# Altium PCB Mach_In.PcbDoc
Units mm, origin at the board's own origin, x right, y up, seen from the top; angles counter-clockwise.
Board outline 160 x 75 mm, 2 copper layers (Top Layer, Bottom Layer); 14 components, 15 nets, 102 pads, 2 vias.
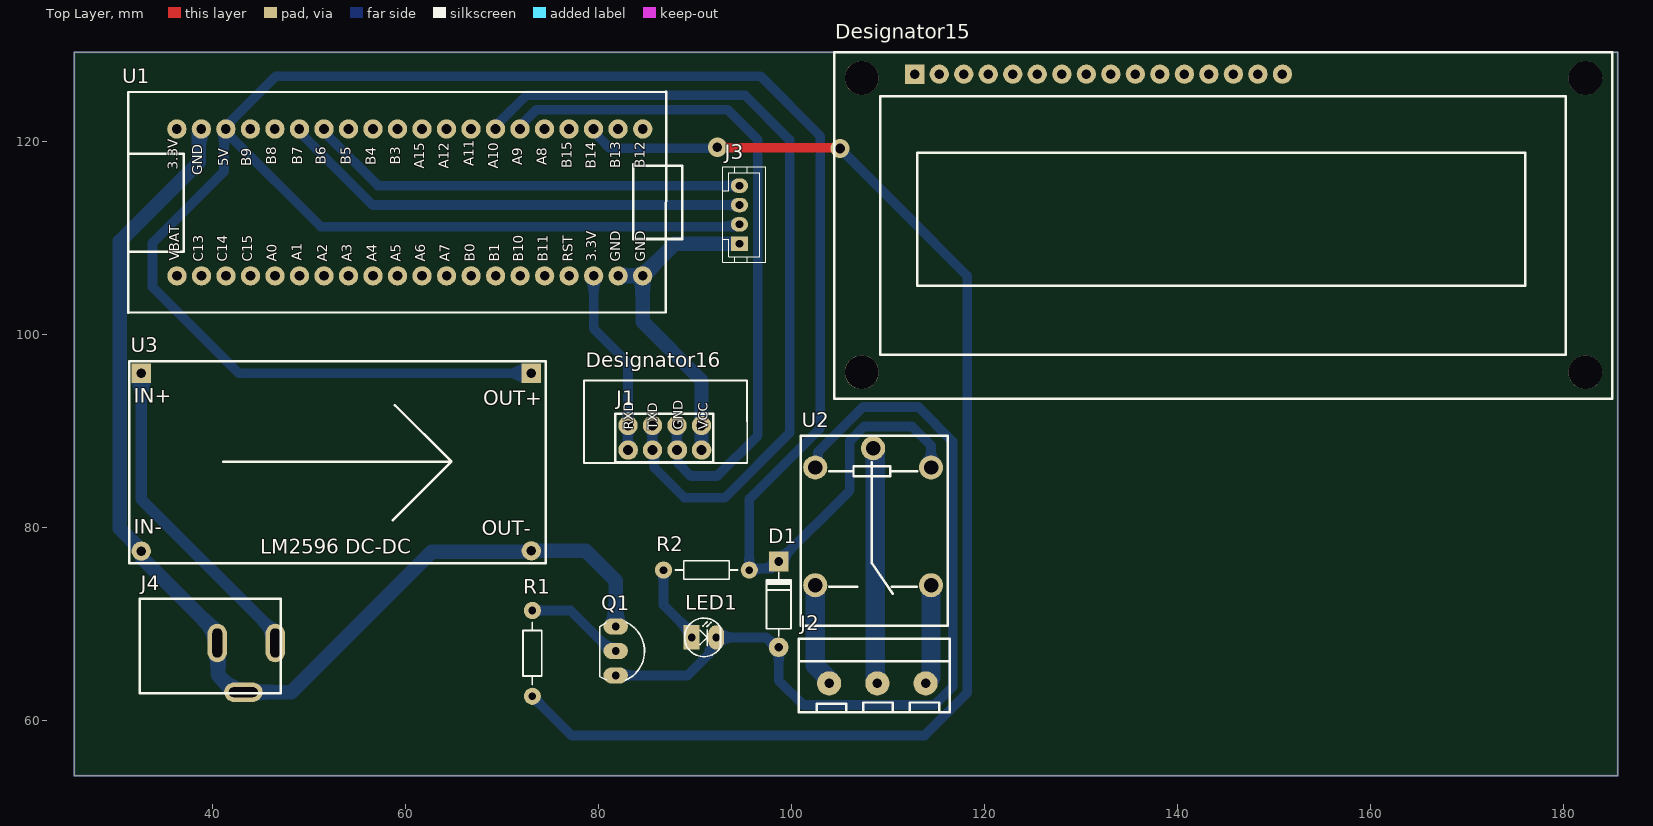
[diagram p0: Top Layer view]
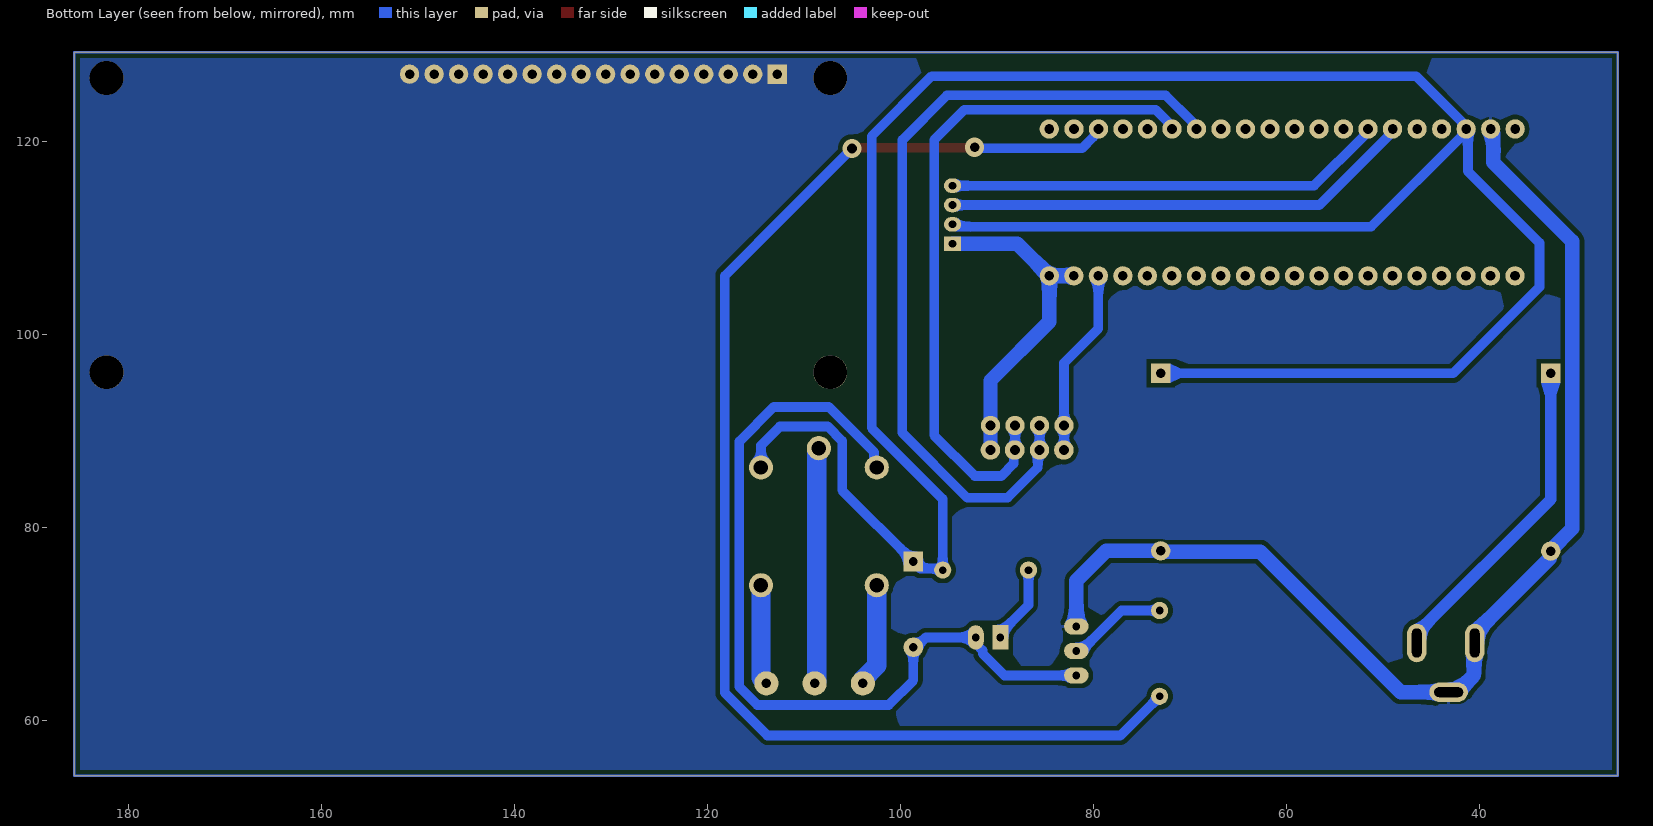
[diagram p1: Bottom Layer view, seen from below]

## Layer stack, top to bottom
Top Solder: solder mask 0.0102, Solder Resist, Dk 3.5
Top Layer: signal copper 0.0356
Dielectric 1: dielectric 0.32, FR-4, Dk 4.8
Bottom Layer: signal copper 0.0356
Bottom Solder: solder mask 0.0102, Solder Resist, Dk 3.5

## Board outline
25.654,54.229 25.654,129.229 185.654,129.229 185.654,54.229

## Design rules (kind name [scope] priority, off if disabled: settings)
Clearance [All] p1: gap=0.5 ignorepadtopadclearanceinfootprint=FALSE
PolygonConnect [All] p1: connectstyle=Relief reliefconductorwidth=0.254 reliefentries=4 polygonreliefangle="90 Angle" airgapwidth=0.254
RoutingLayers [All] p1: top layer_v5=FALSE bottom layer_v5=TRUE
RoutingVias [All] p1: holewidth=0.711 width=1.27 viastyle="Through Hole" minholewidth=0.711 minwidth=1.27 maxholewidth=0.711 maxwidth=1.27
SolderMaskExpansion [All] p1: expansion=0.102 istentingtop=FALSE
SupplyNets "Schematic Supply Nets_3" [InNet('GND')] p1: voltage=0.000
SupplyNets "Schematic Supply Nets_2" [InNet('+12')] p2: voltage=0.000
SupplyNets "Schematic Supply Nets_1" [InNet('+5')] p3: voltage=0.000
SupplyNets "Schematic Supply Nets" [InNet('+3.3')] p4: voltage=0.000
Width 12V [InNet('+12')] p1: maxlimit=1.2 minlimit=1.2 preferedwidth=1.2
Width GND [InNet('GND')] p2: maxlimit=1.5 minlimit=1.5 preferedwidth=1.5
Width 5V [InNet('No Net')] p3: maxlimit=1 minlimit=1 preferedwidth=1
Width 3.3V [All] p4: maxlimit=1 minlimit=1 preferedwidth=1
Width NET [All] p5: maxlimit=0.8 minlimit=0.8 preferedwidth=0.8
29 further rules are at their usual default settings.

## Classes and differential pairs
component class Nguyen_Ly: D1 J1 J2 J3 J4 LED1 Q1 R1 R2 U1 U2 U3

## Components (designator, comment, footprint, x,y, rotation, side; value= is the part's Value field where it differs from the comment)
D1 "1N4007" D1A 98.679,67.564 r270 top
Designator15 "Comment" DISPLAY_LCD_16_2 144.78,111.506 r0 top
Designator16 "Comment" HC-06 86.953,90.927 r0 top
J1 "Zigbee_CC2530" FEMALE-2.54-4x2P 86.868,89.276 r90 top
J2 "BORNE-5.00-3P" BORNE-5.00-3P 108.585,64.643 r270 top
J3 "LCD_I2C" JST-2.00-4P 95.123,112.395 r90 top
J4 "JACK_P4" JACK_P4 39.751,67.691 r180 top
LED1 "LED" LED-3 89.662,68.58 r0 top
Q1 "C9014" QTO-92 81.788,67.183 r270 top
R1 "1k" R1/4W 73.152,62.484 r90 top
R2 "1k" R1/4W 86.741,75.565 r0 top
U1 "STM32" STM32 60.452,113.665 r90 top
U2 "RELE" RELE 108.585,79.629 r270 top
U3 "MODULE_LM2596" MODULE_LM2596 52.832,86.741 r0 top

## Footprints (in the part's own frame and the unit in brackets; to place one, negate y for a bottom-side part, rotate by r counter-clockwise, add the part's x,y. Pads: shape width x height; smd on the part's side, far side on the other; paste and mask are expansions set on the pad)
BORNE-5.00-3P [mm]
  round 2.5 hole 1: 1(0.815,5.317) 2(0.815,0.318) 3(0.815,-4.682)
  silkscreen extent -3.8,-7.81 3.8,7.81, body extent -3.8,-7.79 3.8,7.81, height 10.1
D1A [mil] "Diode 1A, W 100mil, L 350mil"
  round 80 hole 35: 1(0,0)
  rect 80x80 hole 35: 2(-350,0)
  silkscreen extent -305,-50 -45,50, body extent -386,-33 34,36, height 84
DISPLAY_LCD_16_2 [mm]
  rect 2x2 hole 1: 1(-31.999,15.451)
  round 2 hole 1: 2(-29.459,15.451) 3(-26.919,15.451) 4(-24.379,15.451) 5(-21.839,15.451) 6(-19.299,15.451) 7(-16.759,15.451) 8(-14.219,15.451) 9(-11.679,15.451) 10(-9.139,15.451) 11(-6.599,15.451) 12(-4.059,15.451) 13(-1.519,15.451) 14(1.021,15.451) 15(3.561,15.451) 16(6.101,15.451)
  round 3.5 hole 3.5 unplated: ""(-37.5,-15.451) ""(-37.5,15.05) ""(37.5,-15.451) ""(37.5,15.05)
  silkscreen extent -40.35,-18.2 40.3,17.74, body extent -40.35,-18.26 40.35,17.74, height 12
FEMALE-2.54-4x2P [mm]
  round 2 hole 1: 1(-1.275,3.81) 2(-1.275,1.27) 3(-1.275,-1.27) 4(-1.275,-3.81) 5(1.275,-3.81) 6(1.275,-1.27) 7(1.275,1.27) 8(1.275,3.81)
  silkscreen extent -2.52,-5.04 2.47,5.12, body extent -2.27,-4.77 2.27,4.85, height 8.6
HC-06 [mm] "BLUETOOTH MODULE"
  round 2 hole 0.914: 1(3.745,-2.926) 2(1.246,-2.926) 3(-1.355,-2.926) 4(-3.854,-2.926)
  silkscreen extent -8.45,-4.27 8.47,4.27, body extent -8.54,-3.3 8.46,4.22, height 37.5
JACK_P4 [mm]
  oval 2x4 hole 1 slot 3 at 90 deg: 1(-6.746,-0.318) 2(-0.747,-0.318)
  oval 4x2 hole 1 slot 3 at 0 deg: 3(-3.447,4.783)
  silkscreen extent -7.3,-4.89 7.3,4.89, body extent -7.27,-4.92 7.23,4.88, height 11.38
JST-2.00-4P [mm]
  rect 1.5x1.8 hole 0.8 paste-2539.97 mask+0.102: 1(-3,0.508)
  oval 1.5x1.8 hole 0.8 paste-2539.97 mask+0.102: 2(-1,0.508) 3(1,0.508) 4(3,0.508)
  silkscreen extent -4.95,-2.21 4.95,2.23, body extent -4.95,-2.27 4.95,2.23, height 6.1
LED-3 [mil] "LED 2 PIN, 3ly Only colour"
  rect 65x100 hole 32: 1(0,0)
  oval 65x100 hole 32: 2(100,0)
  silkscreen extent -29,-78 118,79, body extent -25,-75 113,75, height 217
MODULE_LM2596 [mm] "MODULE BUCK STEP DOWN 3A 43x20mm"
  round 2 hole 1: 1(20.21,-9.185) 4(-20.21,-9.215)
  rect 2x2 hole 1: 2(20.21,9.215) 3(-20.21,9.215)
  silkscreen extent -21.45,-10.47 21.7,10.49, body extent -21.49,-10.49 21.71,10.61, height 13.15
QTO-92 [mil] "TO-92"
  oval 66x100 hole 32: 1(-100,0) 2(0,0) 3(100,0)
  silkscreen extent -117,-65 120,118, body extent -109,-66 109,95, height 245
R1/4W [mil] "R 1/4W, 2 Pin, 350mil"
  round 70 hole 31: 1(0,0) 2(350,0)
  silkscreen extent 48,-38 302,38, body extent -40,-47 386,47, height 111
RELE [mm]
  round 2.5 hole 1.5: 1(-6.565,5.88) 2(-6.565,-6.12) 3(-8.565,-0.12) 4(5.635,5.88) 5(5.635,-6.12)
  silkscreen extent -9.84,-7.62 9.84,7.62, body extent -9.74,-7.7 9.86,7.7, height 15.5
STM32 [mm]
  round 2 hole 1: 1(7.607,-24.143) 2(7.607,-21.577) 3(7.607,-19.037) 4(7.607,-16.497) 5(7.607,-13.957) 6(7.607,-11.417) 7(7.607,-8.877) 8(7.607,-6.337) 9(7.607,-3.797) 10(7.607,-1.257) 11(7.607,1.283) 12(7.607,3.823) 13(7.607,6.363) 14(7.607,8.903) 15(7.607,11.443) 16(7.607,13.983) 17(7.607,16.523) 18(7.607,19.063) 19(7.607,21.603) 20(7.607,24.143) 21(-7.607,24.132) 22(-7.607,21.592) 23(-7.607,19.052) 24(-7.607,16.512) 25(-7.607,13.972) 26(-7.607,11.432) 27(-7.607,8.892) 28(-7.607,6.352) 29(-7.607,3.812) 30(-7.607,1.272) 31(-7.607,-1.268) 32(-7.607,-3.808) 33(-7.607,-6.348) 34(-7.607,-8.888) 35(-7.607,-11.428) 36(-7.607,-13.968) 37(-7.607,-16.508) 38(-7.607,-19.048) 39(-7.607,-21.588) 40(-7.607,-24.128)
  silkscreen extent -11.44,-28.23 11.47,29.2, body extent -11.4,-27.51 11.46,30.05, height 12.31

## Part data
D1: library part D1A, "Diode 1A"
J1: library part FEMALE-2.54-4x2P, "Female Header Connector 2.54mm 4x2 Pins."
J2: "Borne 3 Vias, Pitch 5mm."
J3: library part JST-2.00-4P, "Female Connector JST 4 Vias, 2.00mm."
J4: "9V Battery Connector Jack P4."
LED1: "LED Single colour Green and Red"
Q1: library part NPN_EBC, "P 600mW, EBC"
R1 R2: library part R1/4W, "Resistor 1/4W"
U2: "Generic Rele PTH 5 Pins."
U3: "MODULE BUCK STEP DOWN 3A 43x20mm"

## Via types
v1: diameter 2, hole 1, Top Layer to Bottom Layer, 2 vias

## Nets (pads, with @x,y where several pads share a name; then routed paths per layer and width w, separated by ;. In a path a pad name is that pad's centre, name@x,y a point inside that pad or via, vN(x,y) a via of type N, cw(c..) or ccw(c..) an arc to the next point about the centre after c; other vN are vias at no path point)
+3.3: J1.1 J1.8 U1.38 | length 19.5
  Bottom Layer w1: U1.38 79.5,100.586 83.058,97.028 J1.8 J1.1
+5: D1.2 J3.2 R2.2 U1.18 U2.1 U3.2 | length 265.6
  Bottom Layer w1: U1.18@41.198,121.081 41.198,121.002 41.198,116.89 33.782,109.474 33.782,104.902 42.728,95.956 U3.2 ; J3.2 94.519,111.299 94.016,111.299 93.861,111.145 51.228,111.145 41.929,120.444 41.929,120.462 41.389,121.002 41.389,121.081 41.389,121.543 41.929,122.083 41.929,122.101 46.575,126.746 96.774,126.746 102.997,120.523 102.997,90.297 95.631,82.931 R2.2 95.78,75.714 97.939,75.714 D1.2 106.045,83.82 106.045,88.956 107.533,90.444 112.502,90.444 114.465,88.481 U2.1
+12: J4.1 U3.3 | length 33.7
  Bottom Layer w1.2: U3.3 32.622,82.884 46.497,69.009 J4.1
COM: J2.2 U2.3 | length 24.5
  Bottom Layer w1: U2.3 U2.3@108.684,87.975 ; J2.2@108.684,64.047 J2.2
  Bottom Layer w2: J2.2@108.684,64.047 U2.3@108.684,87.975
GND: J1.4 J1.5 J3.1 J4.2 J4.3 Q1.1 U1.19 U1.39 U1.40 U3.1 U3.4 | length 152.9
  Bottom Layer w1.5: U1.19 38.849,121.137 38.559,120.847 38.559,117.807 30.372,109.62 30.372,79.872 32.622,77.622 U3.4 32.718,77.43 32.718,76.788 40.498,69.009 J4.2 40.593,67.913 40.593,64.648 42.333,62.908 J4.3 48.176,62.908 62.738,77.47 72.956,77.47 U3.1 78.699,77.556 81.788,74.467 Q1.1 ; U1.39 U1.40 ; J1.4 J1.5 90.678,95.208 84.58,101.305 U1.40 ; J3.1 87.917,109.395 U1.40
NC: J2.1 U2.4 | length 10.4
  Bottom Layer w2: J2.1 114.465,64.391 114.465,66.929 U2.4
NetLED1_1: LED1.1 R2.1 | length 8.2
  Bottom Layer w1: R2.1 86.741,71.945 89.662,69.025 LED1.1
NetQ1_2: Q1.2 R1.2 | length 10.4
  Bottom Layer w1: R1.2 77.106,71.374 81.297,67.183 Q1.2
NO: J2.3 U2.5 | length 10.8
  Bottom Layer w2: U2.5 102.465,65.671 103.903,64.234 J2.3
Role: R1.1 U1.3 | length 137.1
  Top Layer w1: v1@92.381,119.328 v1@105.029,119.328
  Bottom Layer w1: R1.1 77.216,58.42 113.798,58.42 118.215,62.837 118.215,106.067 111.521,112.761 v1(105.029,119.253) ; U1.3 79.489,121.002 80.029,120.462 80.029,120.444 81.201,119.272 92.221,119.272 v1(92.329,119.38) v1@92.381,119.328
RX_Zigbee: J1.3 J1.6 U1.6 | length 72.1
  Bottom Layer w1: U1.6 71.869,121.543 72.409,122.083 72.409,122.101 73.581,123.272 93.39,123.272 96.515,120.147 96.515,89.53 92.305,85.32 89.559,85.32 88.276,86.603 88.276,87.863 J1.3 J1.6
S: D1.1 LED1.2 Q1.3 U2.2 | length 87.3
  Bottom Layer w1: Q1.3 89.235,64.643 91.488,66.896 91.488,67.245 92.202,67.959 LED1.2 97.384,68.58 98.4,67.564 D1.1 98.679,64.135 101.236,61.578 114.834,61.578 116.715,63.459 116.715,88.898 113.157,92.456 107.424,92.456 102.752,87.784 102.752,86.481 U2.2
SCL: J3.4 U1.14 | length 45.7
  Bottom Layer w1: U1.14 51.549,121.002 52.089,120.462 52.089,120.444 57.138,115.395 J3.4
SDA: J3.3 U1.15 | length 49
  Bottom Layer w1: U1.15 49.009,121.002 49.549,120.462 49.549,120.444 56.598,113.395 J3.3
TX_Zigbee: J1.2 J1.7 U1.7 | length 87
  Bottom Layer w1: U1.7 69.329,121.543 69.869,122.083 69.869,122.101 72.541,124.772 95.192,124.772 99.822,120.142 99.822,89.789 93.091,83.058 88.9,83.058 85.789,86.169 85.789,87.81 J1.2 J1.7
pads on no net: Designator15. Designator15.1 Designator15.2 Designator15.3 Designator15.4 Designator15.5 Designator15.6 Designator15.7 Designator15.8 Designator15.9 Designator15.10 Designator15.11 Designator15.12 Designator15.13 Designator15.14 Designator15.15 Designator15.16 Designator16.1 Designator16.2 Designator16.3 Designator16.4 U1.1 U1.2 U1.4 U1.5 U1.8 U1.9 U1.10 U1.11 U1.12 U1.13 U1.16 U1.17 U1.20 U1.21 U1.22 U1.23 U1.24 U1.25 U1.26 U1.27 U1.28 U1.29 U1.30 U1.31 U1.32 U1.33 U1.34 U1.35 U1.36 U1.37
copper on no net: | length 470
  Bottom Layer w0.254: 25.654,54.229 185.654,54.229 185.654,129.229 25.654,129.229 25.654,54.229

## Polygon pours and split planes (outlines as drawn)
GND on Bottom Layer "GND_L02_P000" (solid, remove dead copper, pour order 0): 25.654,129.229 185.654,129.229 185.654,54.229 25.654,54.229

## Text inside footprints (layer, text, board x,y; h text height)
Designator16: Top Overlay "VCC" at 91.315,90.112 h1 r90; Top Overlay "GND" at 88.719,90.112 h1 r90; Top Overlay "TXD" at 86.113,90.127 h1 r90; Top Overlay "RXD" at 83.614,90.127 h1 r90
U1: Top Overlay "5V" at 41.992,117.437 h1.78 r90; Top Overlay "B9" at 44.405,117.437 h1.78 r90; Top Overlay "B8" at 46.945,117.564 h1.78 r90; Top Overlay "3.3V" at 36.785,117.056 h1.78 r90; Top Overlay "GND" at 39.299,116.492 h1.78 r90; Top Overlay "A5" at 59.899,107.531 h1.78 r90; Top Overlay "A2" at 52.248,107.531 h1.78 r90; Top Overlay "A3" at 54.793,107.531 h1.78 r90; Top Overlay "A4" at 57.379,107.531 h1.78 r90; Top Overlay "RST" at 77.679,107.531 h1.78 r90; Top Overlay "B10" at 72.548,107.531 h1.78 r90; Top Overlay "B11" at 75.133,107.531 h1.78 r90; Top Overlay "A6" at 62.388,107.531 h1.78 r90; Top Overlay "A7" at 64.973,107.531 h1.78 r90; Top Overlay "B0" at 67.519,107.531 h1.78 r90; Top Overlay "B1" at 70.079,107.531 h1.78 r90; Top Overlay "3.3V" at 80.143,107.531 h1.78 r90; Top Overlay "B15" at 77.577,117.193 h1.78 r90; Top Overlay "A8" at 75.012,117.5 h1.78 r90; Top Overlay "A11" at 67.437,117.417 h1.78 r90; Top Overlay "B3" at 59.797,117.564 h1.78 r90; Top Overlay "A9" at 72.446,117.531 h1.78 r90; Top Overlay "A15" at 62.286,117.13 h1.78 r90; Top Overlay "A12" at 64.872,117.13 h1.78 r90; Top Overlay "A10" at 69.957,117.13 h1.78 r90; Top Overlay "VBAT" at 36.906,107.604 h1.78 r90; Top Overlay "B5" at 54.692,117.564 h1.78 r90; Top Overlay "B14" at 80.061,117.163 h1.78 r90; Top Overlay "B7" at 49.657,117.564 h1.78 r90; Top Overlay "B4" at 57.277,117.531 h1.78 r90; Top Overlay "B6" at 52.126,117.594 h1.78 r90; Top Overlay "C15" at 44.481,107.531 h1.78 r90; Top Overlay "C13" at 39.426,107.531 h1.78 r90; Top Overlay "C14" at 41.916,107.531 h1.78 r90; Top Overlay "A0" at 47.046,107.531 h1.78 r90; Top Overlay "A1" at 49.606,107.602 h1.78 r90; Top Overlay "GND" at 82.632,107.531 h1.78 r90; Top Overlay "B13" at 82.632,117.183 h1.78 r90; Top Overlay "GND" at 85.197,107.531 h1.78 r90; Top Overlay "B12" at 85.141,117.193 h1.78 r90
U3: Top Overlay "LM2596 DC-DC" at 44.941,77.272 h1.52; Top Overlay "OUT+" at 68.055,92.639 h1.52; Top Overlay "IN-" at 31.86,79.304 h1.52; Top Overlay "IN+" at 31.86,92.893 h1.52; Top Overlay "OUT-" at 67.928,79.177 h1.52